# Altium PCB sahne1544.PcbDoc
Units mm, origin at the board's own origin, x right, y up, seen from the top; angles counter-clockwise.
Board outline 49 x 89 mm, 2 copper layers (Top Layer, Bottom Layer), stack 1.571 mm thick; 35 components, 37 nets, 172 pads, 0 vias.
Unrouted connection lines stored in the file: 114.
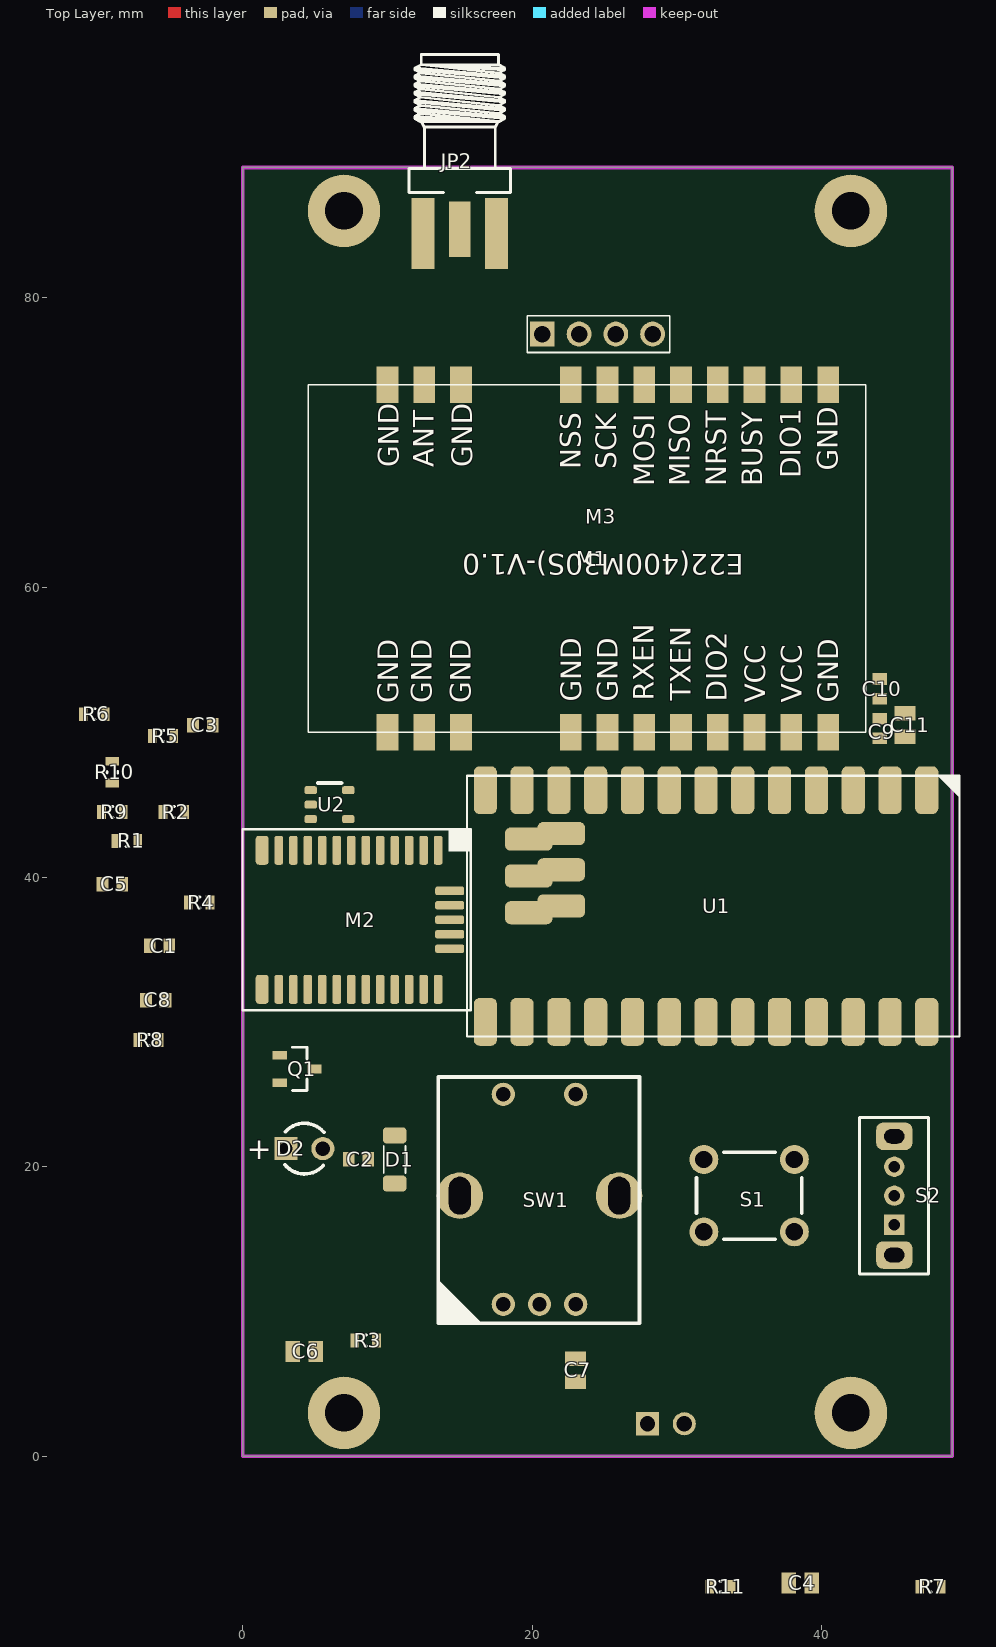
[diagram p0: Top Layer view]
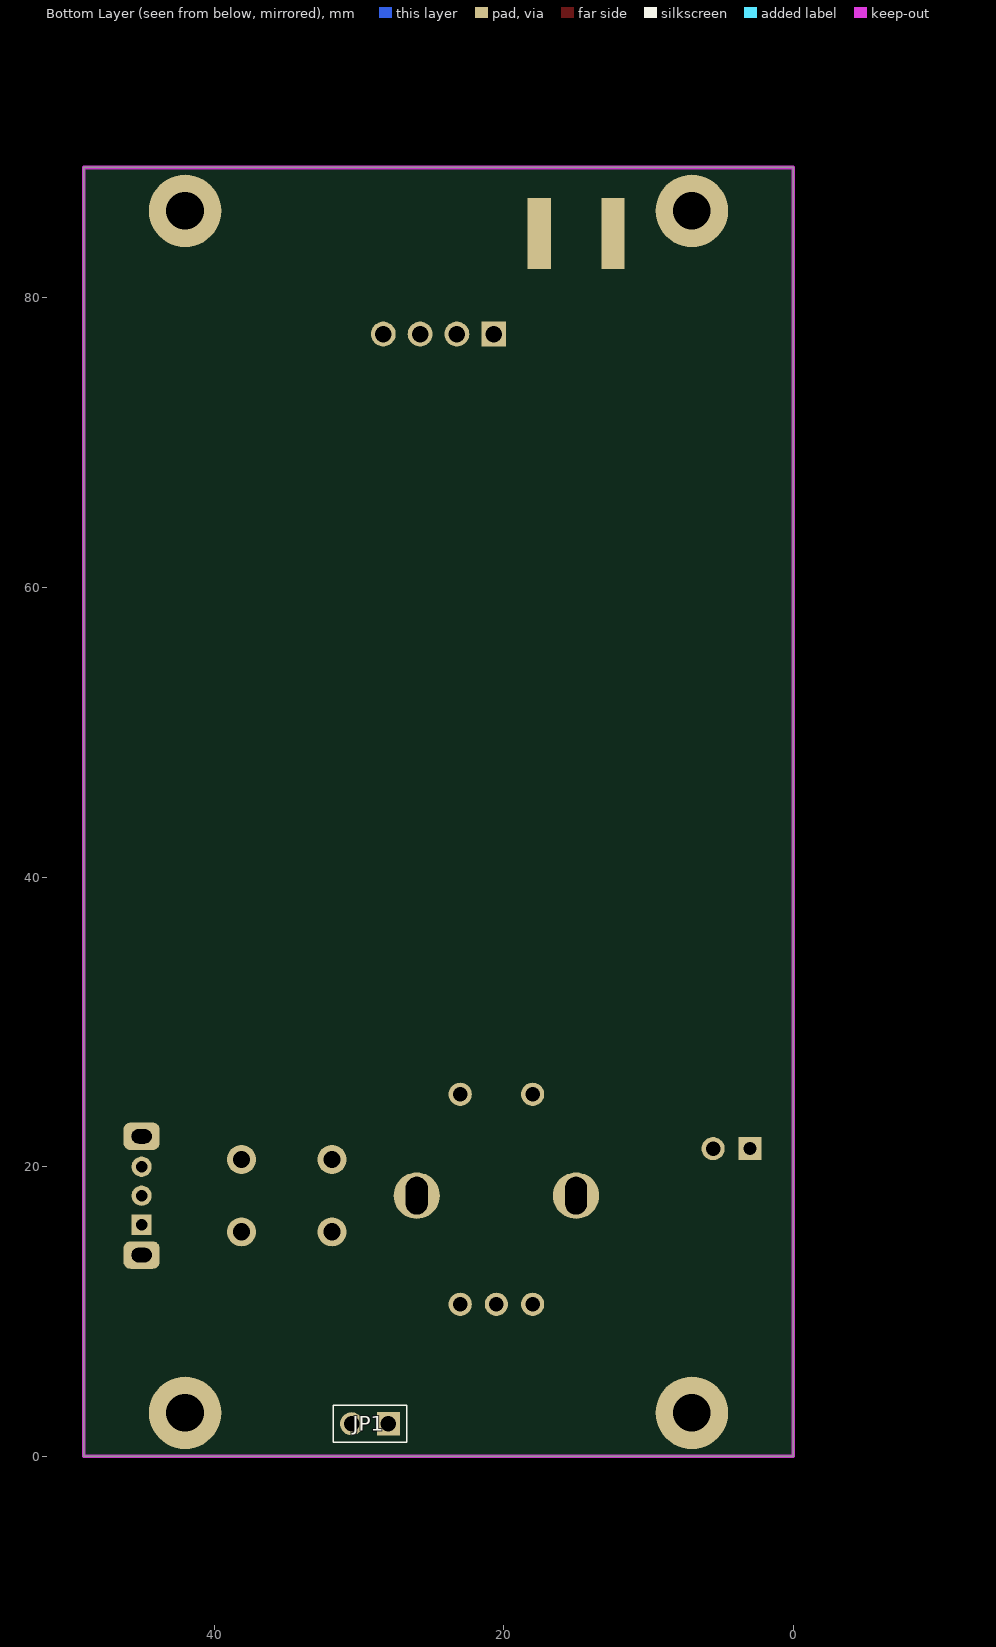
[diagram p1: Bottom Layer view, seen from below]

## Layer stack, top to bottom
Top Solder: solder mask 0.0102, Solder Resist, Dk 3.5
Top Layer: signal copper 0.0356
Dielectric 1: dielectric 1.5, FR-4, Dk 4.8
Bottom Layer: signal copper 0.0356
Bottom Solder: solder mask 0.0102, Solder Resist, Dk 3.5

## Board outline
0,0 49,0 49,89 0,89

## Design rules (kind name [scope] priority, off if disabled: settings)
Clearance [All] p1: gap=0.254 ignorepadtopadclearanceinfootprint=FALSE
PolygonConnect [All] p1: connectstyle=Relief reliefconductorwidth=0.254 reliefentries=4 polygonreliefangle="90 Angle" airgapwidth=0.254
RoutingVias [All] p1: holewidth=0.711 width=1.27 viastyle="Through Hole" minholewidth=0.711 minwidth=1.27 maxholewidth=0.711 maxwidth=1.27
SolderMaskExpansion [All] p1: expansion=0 istentingtop=FALSE
SupplyNets "Schematic Supply Nets_3" [InNet('V_GPS')] p1: voltage=0.000
SupplyNets "Schematic Supply Nets_2" [InNet('+VBATT')] p2: voltage=0.000
SupplyNets "Schematic Supply Nets_1" [InNet('GND')] p3: voltage=0.000
SupplyNets "Schematic Supply Nets" [InNet('VCC')] p4: voltage=0.000
Width [All] p1: maxlimit=0.254 minlimit=0.254 preferedwidth=0.254
30 further rules are at their usual default settings.

## Components (designator, comment, footprint, x,y, rotation, side; value= is the part's Value field where it differs from the comment)
C1 "nc" C-0603 -5.751,35.25 r0 top
C2 "CAPN" C-0603 8,20.5 r0 top
C3 "CAPN" C-0603 -2.75,50.5 r0 top
C4 "10uF" C-0805 38.5,-8.75 r0 top
C5 "CAPN" C-0603 -9,39.5 r0 top
C6 "10uF" C-0805 4.25,7.25 r0 top
C7 "10uF" C-0805 23,5.95 r90 top
C8 "CAPN" C-0603 -6,31.5 r0 top
C9 "CAPN" C-0603 44,50.25 r90 top
C10 "CAPN" C-0603 44,53 r90 top
C11 "10uF" C-0805 45.75,50.5 r270 top
D1 "DIODSH" SOD80 10.5,20.5 r90 top
D2 "DLED" LED_3mm_RED 4.27,21.25 r0 top
JP1 "HEADER 2" PLS1-2 27.96,2.25 r0 bottom
JP2 "EM-SA071-GGT" SMA_F_EDGE 15,86 r270 top
M1 "E22-400M30S" PE22(400M30S) 10,50 r180 top
M2 "SIM32ELA" LGA_SIM32 7.5,37.05 r270 top
M3 "OLED0_96" OLED096_I2C 20.69,77.5 r0 top locked
Q1 "MMUN2211" SOT-23 3.75,26.75 r0 top
R1 "nc" R-0603 -8.001,42.5 r0 top
R2 "10k" R-0603 -4.75,44.5 r0 top
R3 "680k" R-0603 8.5,8 r0 top
R4 "1M" R-0603 -3,38.25 r0 top
R5 "10k" R-0603 -5.5,49.75 r0 top
R6 "10k" R-0603 -10.25,51.25 r0 top
R7 "100k" R-0603 47.5,-9 r0 top
R8 "10k" R-0603 -6.5,28.75 r0 top
R9 "1k" R-0603 -9,44.5 r0 top
R10 "1k" R-0603 -9,47.25 r90 top
R11 "1k" R-0603 33,-9 r0 top
S1 "KLS7-TS3602 -3 15-180" BUTT_MIN 35,18 r0 top
S2 "SW SPDT" SK-12D07VG5 45,18 r90 top
SW1 "EC11" EC11 20.5,18 r90 top
U1 "NICENANO_V2" NICENANO_SMD 32,38 r270 top locked
U2 "LP5907MFX-3.3" SOT-23-5 6,45 r0 top

## Footprints (in the part's own frame and the unit in brackets; to place one, negate y for a bottom-side part, rotate by r counter-clockwise, add the part's x,y. Pads: shape width x height; smd on the part's side, far side on the other; paste and mask are expansions set on the pad)
BUTT_MIN [mm]
  round 2 hole 1.2 mask+0.05: 1(-3.15,-2.5) 1(3.1,-2.5) 2(-3.15,2.5) 2(3.1,2.5)
  silkscreen extent -3.66,-3 3.6,3, body extent -3.95,-3.1 3.95,3.1, height 7.01
C-0603 [mm] "Chip Capacitor, 2-Leads, Body 1,60x0,80mm, IPC Medium Density"
  rect 0.8x1 smd: 1(-0.675,0) 2(0.675,0)
  body extent -0.8,-0.4 0.8,0.4, height 0.8
C-0805 [mm] "Chip Capacitor, 2-Leads, Body 2,00x1,25mm, IPC Medium Density"
  rect 1x1.45 smd: 1(-0.8,0) 2(0.8,0)
  body extent -1,-0.62 1,0.63, height 1.25
EC11 [mm] "ALPS rotary encoder"
  round 1.6 hole 1: 1(-7.5,2.5) 2(-7.5,0) 3(-7.5,-2.5) 4(7,-2.5) 5(7,2.5)
  round 3.2 hole 1.5 slot 2.6 at 0 deg: 6(0,5.5) 6(0,-5.5)
  silkscreen extent -8.8,-6.9 8.2,7, body extent -7.73,-5.86 7.22,5.86, height 19.5
LED_3mm_RED [mm]
  rect 1.6x1.6 hole 0.9: 1(-1.27,0)
  round 1.6 hole 1: 2(1.27,0)
  silkscreen extent -1.34,-1.75 1.34,1.75, body extent -1.9,-1.9 1.6,1.9, height 5.75
LGA_SIM32 [mm] "0mm"
  rrect50% 2x0.6 smd mask+0.1: 1(-4.8,6) 2(-4.8,5) 3(-4.8,4) 4(-4.8,3) 5(-4.8,2) 6(-4.8,1) 7(-4.8,0) 8(-4.8,-1) 9(-4.8,-2) 10(-4.8,-3) 11(-4.8,-4) 12(-4.8,-5) 15(4.8,-5) 16(4.8,-4) 17(4.8,-3) 18(4.8,-2) 19(4.8,-1) 20(4.8,0) 21(4.8,1) 22(4.8,2) 23(4.8,3) 24(4.8,4) 25(4.8,5) 26(4.8,6)
  rrect50% 2x0.9 smd mask+0.1: 13(-4.8,-6.15) 14(4.8,-6.15)
  rrect50% 0.6x2 smd mask+0.1: 27(2,6.8) 28(1,6.8) 29(0,6.8) 30(-1,6.8) 31(-2,6.8)
  silkscreen extent -6.25,-7.5 6.25,8.25, body extent -4.8,-7.22 4.8,6.75, height 2.25
NICENANO_SMD [mm]
  rrect50% 3.3x1.6 smd: 1(-8,15.24) 2(-8,12.7) 3(-8,10.16) 4(-8,7.62) 5(-8,5.08) 6(-8,2.54) 7(-8,0) 8(-8,-2.54) 9(-8,-5.08) 10(-8,-7.62) 11(-8,-10.16) 12(-8,-12.7) 13(-8,-15.24) 14(8,-15.24) 15(8,-12.7) 16(8,-10.16) 17(8,-7.62) 18(8,-5.08) 19(8,-2.54) 20(8,0) 21(8,2.54) 22(8,5.08) 23(8,7.62) 24(8,10.16) 25(8,12.7) 26(8,15.24)
  rrect50% 1.6x3.3 smd: 27(-5,-10) 27(-4.62,-12.24) 28(-2.5,-10) 28(-2.08,-12.24) 29(0,-10) 29(0.46,-12.24)
  silkscreen extent -9,-16.5 9,17.5, body extent -8.9,-16.73 8.9,17.43, height 2.5
OLED096_I2C [mm] "Header, Vertical, 2.54 mm pitch; 0.70 mm lead width, 7 pins, 1 row, 7 pins per row, 16.51 mm L X 2.54 mm W X 7.54 mm H body"
  rect 1.71x1.71 hole 1.14 paste-2539.97: 1(0,0)
  round 1.71 hole 1.14 paste-2539.97: 2(2.54,0) 3(5.08,0) 4(7.62,0)
  silkscreen extent -1.04,-1.27 8.8,1.27, body extent -10.19,-26.7 17.81,1.3, height 7.08
PE22(400M30S) [mm] "38.5mm*24mm*3.8mm-S"
  rect 1.5x2.5 smd: 1(0,0) 2(-2.54,0) 3(-5.08,0) 4(-12.65,0) 5(-15.19,0) 6(-17.73,0) 7(-20.27,0) 8(-22.81,0) 9(-25.35,0) 10(-27.89,0) 11(-30.43,0) 12(-30.43,-24) 13(-27.89,-24) 14(-25.35,-24) 15(-22.81,-24) 16(-20.27,-24) 17(-17.73,-24) 18(-15.19,-24) 19(-12.65,-24) 20(-5.08,-24) 21(-2.54,-24) 22(0,-24)
  silkscreen extent -33.04,-24 5.46,0, body extent -32.81,-24.01 5.69,0.01, height 3.87
PLS1-2 [mm] "Header, Vertical, 2.54 mm pitch; 0.64 mm lead width, 2 pins, 1 row, 2 pins per row, 5.08 mm L X 2.54 mm W X 8.54 mm H body"
  rect 1.59x1.59 hole 1.06 paste-2539.97: 1(0,0)
  round 1.59 hole 1.06 paste-2539.97: 2(2.54,0)
  silkscreen extent -1.27,-1.27 3.81,1.27, body extent -1.27,-1.27 3.81,1.27, height 8.54
R-0603 [mm] "Chip Resistor, 2-Leads, Body 1,60x0,82mm, IPC Medium Density"
  rect 0.6x0.95 smd: 1(-0.75,0) 2(0.75,0)
  silkscreen extent -0.05,-0.38 0.05,0.38, body extent -0.8,-0.4 0.8,0.4, height 0.45
SK-12D07VG5 [mm]
  rect 1.4x1.4 hole 0.8: 1(-2,0)
  round 1.4 hole 0.8: 2(0,0) 3(2,0)
  rrect50% 1.9x2.5 hole 1 slot 1.4 at 90 deg: S1(-4.1,0) S1(4.1,0)
  silkscreen extent -5.4,-2.35 5.4,2.4, body extent -4.3,-7.05 4.3,2.3, height 4.75
SMA_F_EDGE [mm] "SMA End Launch Jack for 1.58mm PCB, 50 Ohm, Flat Tab Contact"
  rect 3.81x1.5 smd: 1(1.27,0)
  rect 4.9x1.6 smd: 2(1.575,2.54) 2(1.575,-2.54)
  rect 4.9x1.6 smd far side: 2(1.575,2.54) 2(1.575,-2.54)
  silkscreen extent -10.81,-3.5 -1.28,3.5, body extent -10.73,-3.25 2.77,3.25, height 3.7
SOD80 [mm] "Diode, Metal Electrode Leadless Face (MELF); 3.45 mm L X 1.40 mm Dia body"
  rrect45% 1.1x1.63 smd: 1(1.66,0) 2(-1.66,0)
  silkscreen extent -0.93,-0.75 0.93,0.75, body extent -1.73,-0.7 1.73,0.7, height 1.4
SOT-23 [mm]
  rect 1x0.6 smd: 1(-1.2,0.95) 2(-1.2,-0.95) 3(1.2,0)
  silkscreen extent -0.3,-1.5 0.7,1.5, body extent -1.25,-1.5 1.25,1.5, height 1.2
SOT-23-5 [mm]
  rrect50% 0.85x0.55 smd mask+0.06: 1(-1.3,1) 2(-1.3,0) 3(-1.3,-1) 4(1.3,-1) 5(1.3,1)
  silkscreen extent -0.8,1.5 0.8,1.5, body extent -1.4,-1.45 1.4,1.45, height 1.45

## Part data
C1 C4 C6 C7 C11: library part CAPN, Voltage=50V, Вид=Конденсатор, Точність/група=NP0
C2 C3 C5 C8 C9 C10: Voltage=50V, Вид=Конденсатор, Точність/група=NP0
JP2: library part SMA, "SMA Female R/A PCB Mount", Вид=Роз'єм
M1: library part E22
M3: library part OLED0_96_I2C
R1 R2 R3 R4 R5 R6 R7 R8 R9 R10 R11: library part RES, Вид=Резистор, Точність/група=5%
S1: library part SW-1, Вид=Кнопка
U2: library part LP5907, "250mA Low-Dropout Regulator", Вид=Мікросхема
D1: Вид=Діод
D2: Вид=Світлодіод
JP1: Вид=Роз'єм
M2: Вид=Модуль
Q1: Вид=Транзистор
S2: Вид=Перемикач
U1: Вид=Мікросхема

## Free pads (board coordinates)
  round 5 hole 2.6: 0(7,3) 0(7,86) 0(42,3) 0(42,86)

## Nets (pads, with @x,y where several pads share a name; then routed paths per layer and width w, separated by ;. In a path a pad name is that pad's centre, name@x,y a point inside that pad or via, vN(x,y) a via of type N, cw(c..) or ccw(c..) an arc to the next point about the centre after c; other vN are vias at no path point)
1PPS: M2.29 Q1.1
+VBATT: C4.1 C9.1 C10.1 C11.1 M1.9 M1.10 R3.2 S2.2 U1.25 U1.26 U2.1
AIN0_VBATT: R3.1 R4.2 U1.21
ANT_SW: M1.6 U1.6
BUSY: M1.14 U1.20
ENC_A: C2.1 R5.2 SW1.1 U1.29
ENC_B: C3.1 R6.2 SW1.3 U1.28
ENC_EXT: U1.13
ENC_PUSH: C5.1 R8.2 SW1.5 U1.27
GND: C1.2 C2.2 C3.2 C4.2 C5.2 C6.2 C7.2 C9.2 C10.2 C11.2 JP1.2 JP2.2 M1.1 M1.2 M1.3 M1.4 M1.5 M1.11 M1.12 M1.20 M1.22 M2.4 M2.5 M2.10 M2.11 M2.12 M2.13 M2.14 M2.15 M2.18 M2.19 M2.21 M2.22 M2.27 M2.31 M3.1 Q1.2 R4.1 R7.1 S1.1 SW1.2 SW1.4 SW1.6 U1.1 U1.4 U1.5 U1.24 U2.2
GPS_EN: R7.2 U1.9 U2.3
GPS_RX: R9.2 U1.8
GPS_TX: R10.2 U1.7
KEY: R2.2 S1.2 U1.10
MISO: M1.16 U1.19
MOSI: M1.17 U1.18
NetC7_1: C7.1 D1.2 M2.8
NetC8_1: C8.1 M1.21
NetC8_2: C8.2 JP2.1
NetD2_1: D2.1 R11.1
NetD2_2: D2.2 Q1.3
NetJP1_1: JP1.1 S2.1
NetM2_16: M2.16 M2.17
NetM2_25: M2.25 R9.1
NetM2_26: M2.26 R10.1
NSS: M1.19 U1.17
RF_IRQ: M1.13 U1.15
RF_RST: M1.15 U1.14
RST: C1.1 R1.1 U1.23
RXD2: U1.2
SCK: M1.18 U1.16
SCL: M3.3 U1.11
SDA: M3.4 U1.12
TXD2: U1.3
TXEN: M1.7 M1.8
V_GPS: C6.1 D1.1 M2.9 R11.2 U2.5
VCC: M3.2 R1.2 R2.1 R5.1 R6.1 R8.1 U1.22
pads on no net: M2.1 M2.2 M2.3 M2.6 M2.7 M2.20 M2.23 M2.24 M2.28 M2.30 S2.3 S2.S1 U2.4

## Keep-outs
Keep-Out Layer:
  the board outline again, w0.254

## Silkscreen, mask and mechanical layers (free items; w line width, h text height)
Mechanical 11:
  lines w0.254: -0.242,10.5 40.758,10.5 ; 0,78.5 41,78.5 ; 0.25,54.613 40.904,54.613

## Text inside footprints (layer, text, board x,y; h text height)
D2: Top Overlay "+" at 0.27,20.5 h1.5
M1: Top Overlay "E22(400M30S)-V1.0" at 34.599,62.278 h1.4 r180; Top Overlay "GND" at 23.366,52.096 h1.4 r90; Top Overlay "GND" at 25.899,52.096 h1.4 r90; Top Overlay "RXEN" at 28.402,52.169 h1.4 r90; Top Overlay "TXEN" at 30.935,52.169 h1.4 r90; Top Overlay "DIO2" at 33.438,52.117 h1.4 r90; Top Overlay "VCC" at 36.076,52.051 h1.4 r90; Top Overlay "VCC" at 38.61,52.051 h1.4 r90; Top Overlay "GND" at 41.143,52.051 h1.4 r90; Top Overlay "GND" at 15.743,51.991 h1.4 r90; Top Overlay "GND" at 13.07,51.991 h1.4 r90; Top Overlay "GND" at 10.748,51.991 h1.4 r90; Top Overlay "GND" at 10.775,68.291 h1.4 r90; Top Overlay "ANT" at 13.202,68.291 h1.4 r90; Top Overlay "GND" at 15.844,68.291 h1.4 r90; Top Overlay "GND" at 41.079,68.064 h1.4 r90; Top Overlay "DIO1" at 38.532,67.552 h1.4 r90; Top Overlay "BUSY" at 35.871,66.979 h1.4 r90; Top Overlay "NRST" at 33.406,66.979 h1.4 r90; Top Overlay "MISO" at 30.881,66.979 h1.4 r90; Top Overlay "MOSI" at 28.416,66.979 h1.4 r90; Top Overlay "SCK" at 25.816,68.17 h1.4 r90; Top Overlay "NSS" at 23.351,68.17 h1.4 r90